# Altium PCB PCB1.PcbDoc
Units mil, origin at the board's own origin, x right, y up, seen from the top; angles counter-clockwise.
Board outline 3266.25 x 3995 mil, 4 copper layers (Top Layer, GND, Power, Bottom Layer), stack 30.634 mil thick; 104 components, 63 nets, 320 pads, 68 vias.
Unrouted connection lines stored in the file: 1.
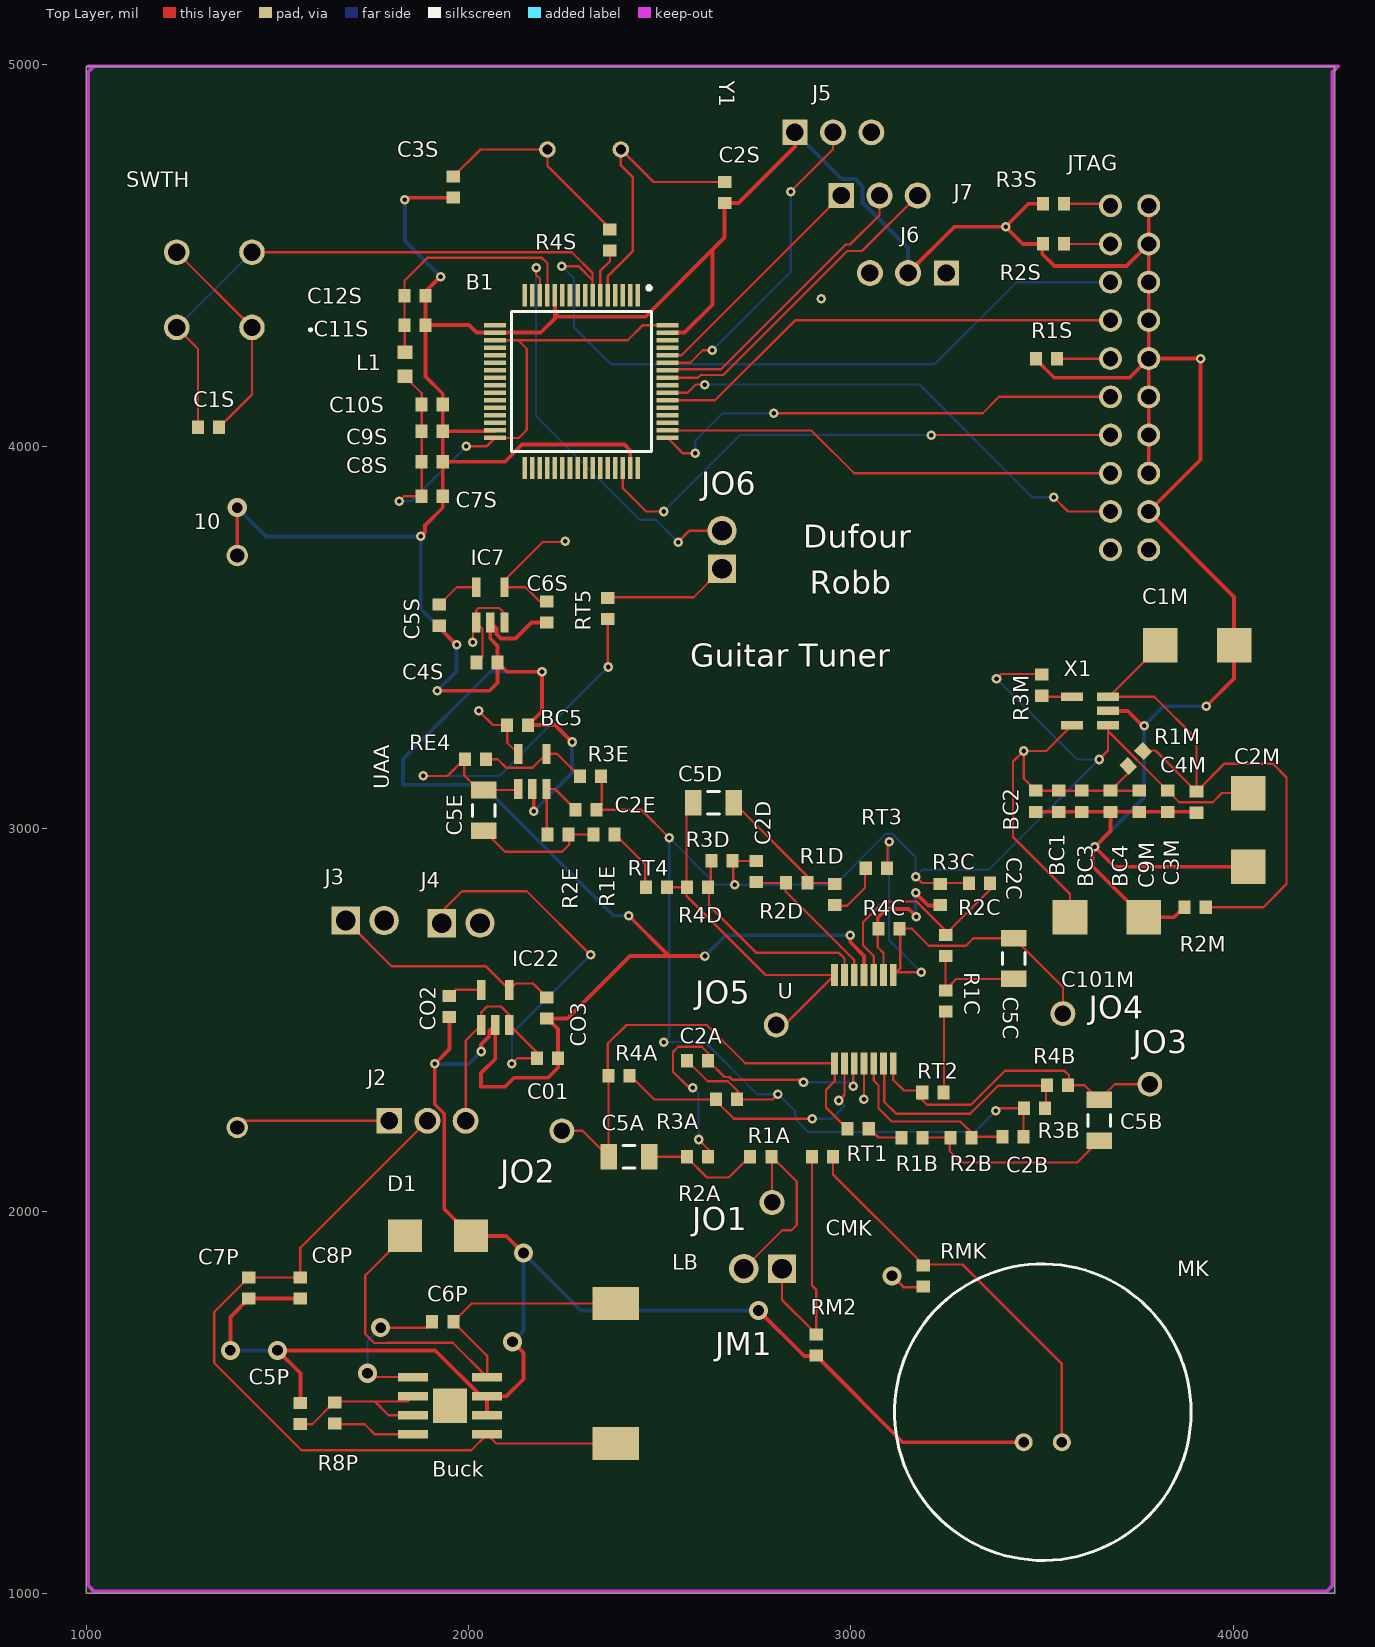
[diagram p0: Top Layer view]
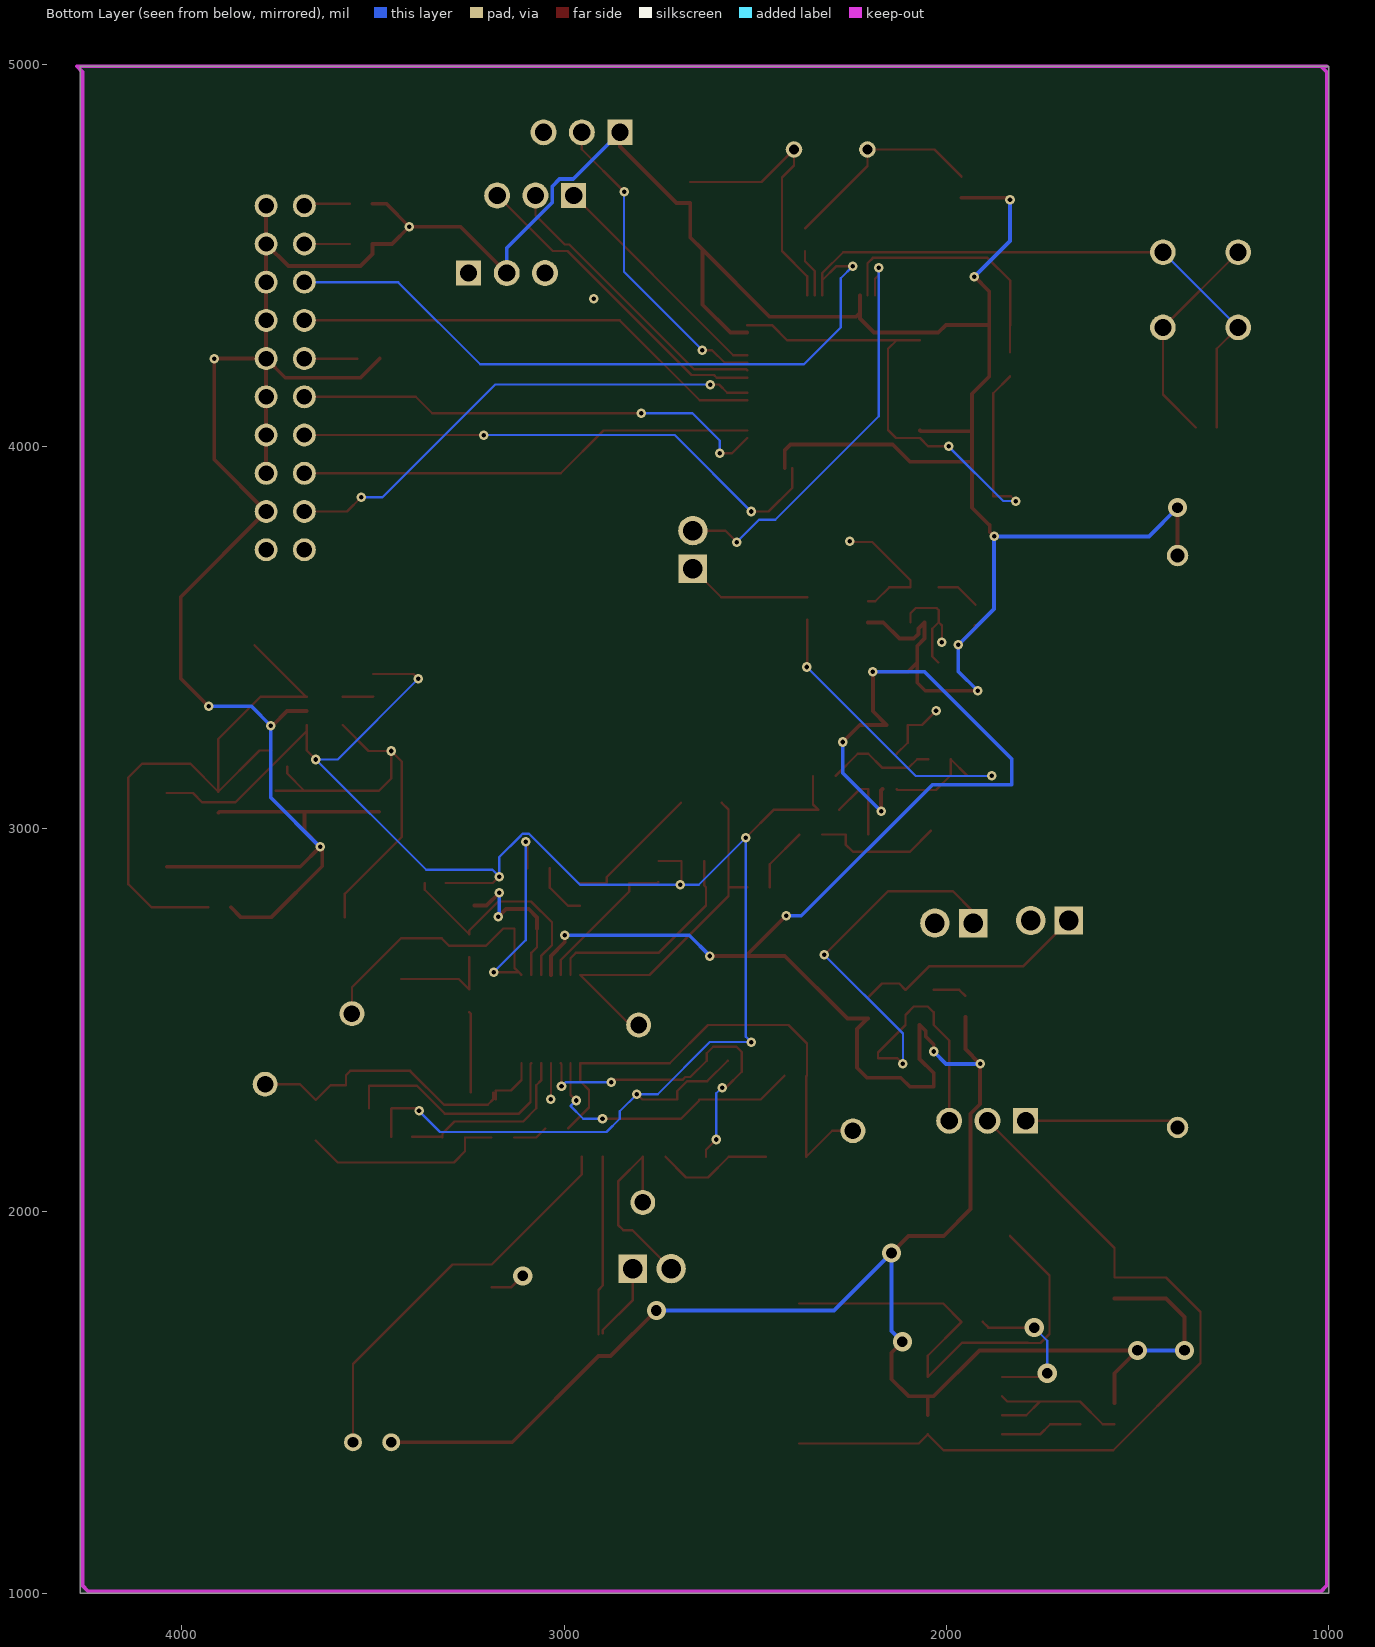
[diagram p1: Bottom Layer view, seen from below]
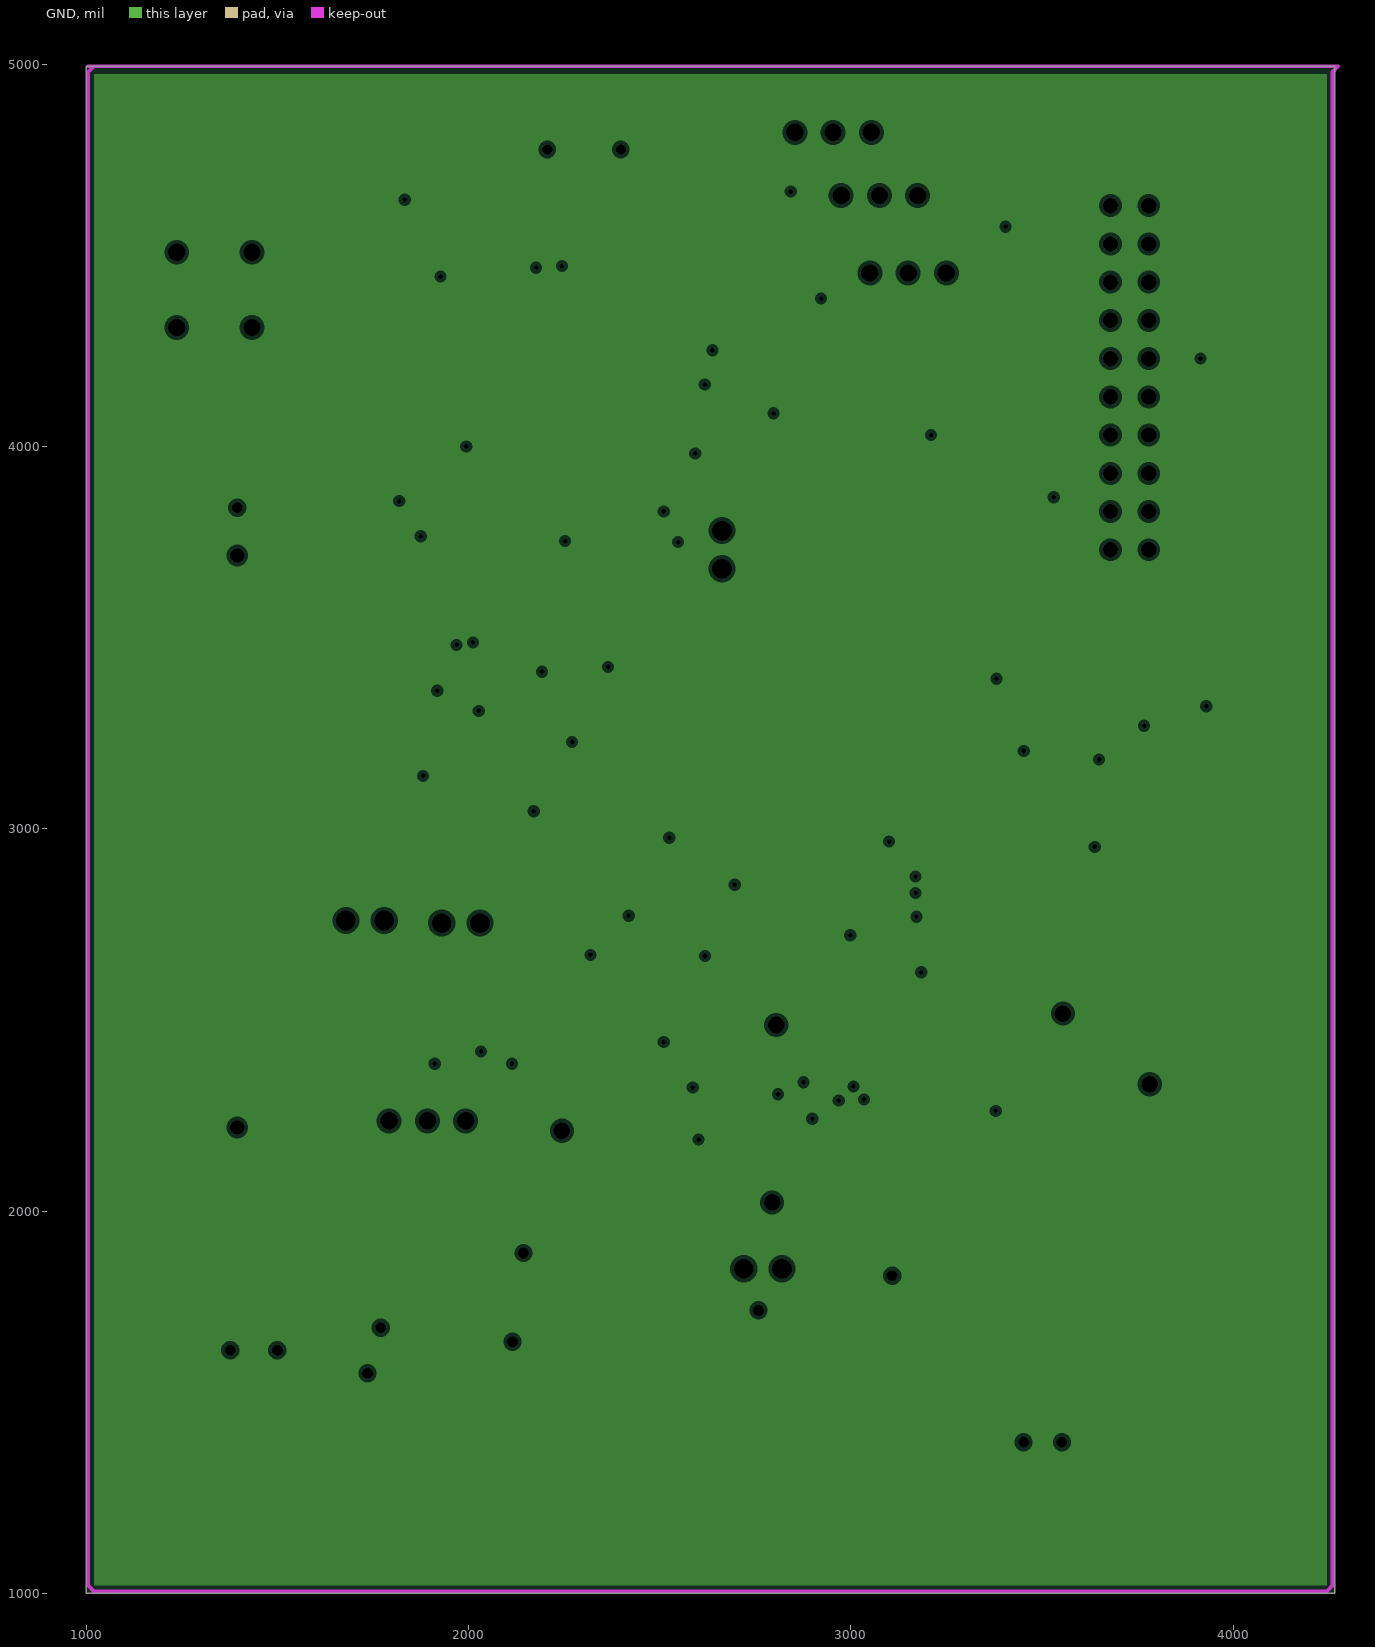
[diagram p2: GND, clearances drawn from the general rule]
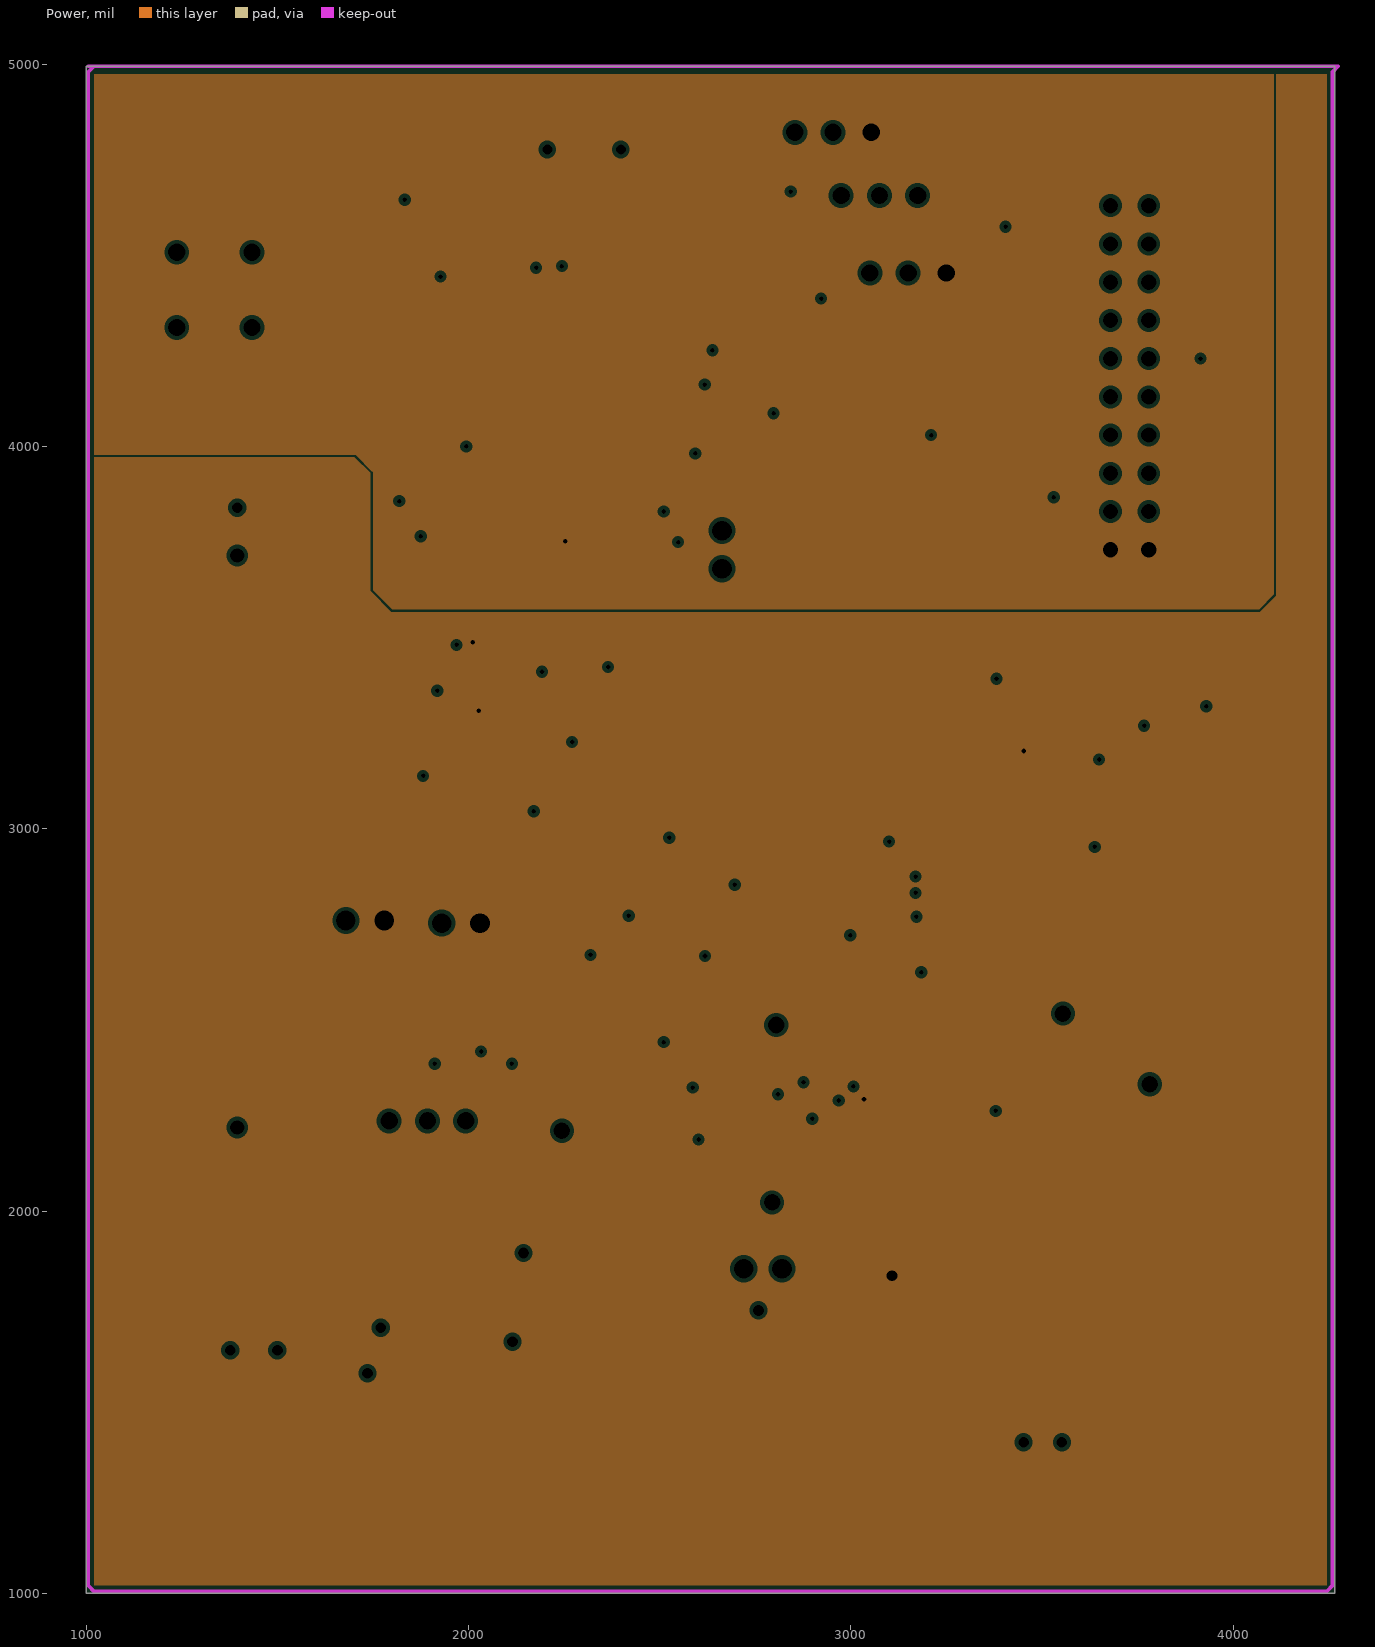
[diagram p3: Power, clearances drawn from the general rule]

## Layer stack, top to bottom
Top Solder: solder mask 0.4, Solder Resist, Dk 3.5
Top Layer: signal copper 1.4
Dielectric 1: core 10, FR-4, Dk 4.2
GND: plane copper 1.417
Dielectric 3: prepreg 5, Dk 4.2
Power: plane copper 1.417, net VCC
Dielectric 2: core 10, Dk 4.2
Bottom Layer: signal copper 1.4
Bottom Solder: solder mask 0.4, Solder Resist, Dk 3.5

## Board outline
4266.25,4995 4150,4995 1000,4995 1000,1000 4266.25,1000

## Design rules (kind name [scope] priority, off if disabled: settings)
BoardOutlineClearance [All] p1: gap=15 ignorepadtopadclearanceinfootprint=FALSE
Clearance "Clearance Polygons" [InPolygon] p1: gap=10 ignorepadtopadclearanceinfootprint=FALSE except(0: Arc-Hole Track-Hole SMDPad-Hole THPad-Hole Via-Hole Fill-Hole Poly-Hole Region-Hole Text-Hole)
Clearance [All] p2: gap=5 ignorepadtopadclearanceinfootprint=FALSE except(0: Arc-Hole Track-Hole SMDPad-Hole THPad-Hole Via-Hole Fill-Hole Poly-Hole Region-Hole Text-Hole)
ComponentClearance "HM-TRP & UFL" [InComponent('X1') vs InComponent('U1')] p1: gap=0 collisioncheckmode=3 verticalgap=0 showdistances=FALSE
ComponentClearance [All] p2: gap=1 collisioncheckmode=3 verticalgap=1 showdistances=FALSE
DiffPairsRouting [All] p1: maxlimit=393.7 minlimit=5 mostfreqgap=8 toplayer_minwidth=5 toplayer_maxwidth=15 toplayer_prefwidth=8 bottomlayer_minwidth=5 bottomlayer_maxwidth=15 bottomlayer_prefwidth=8 maxuncoupledlength=500
HoleSize [All] p1: absolutevalues=TRUE maxlimit=265 minlimit=10 maxpercent=80.000 minpercent=20.000
HoleToHoleClearance [All] p1: gap=10 allowstackedmicrovias=FALSE
MinimumAnnularRing [All] p1: minimumring=4
MinimumSolderMaskSliver [All] p1: minsoldermaskwidth=0
PlaneClearance [All] p1: clearance=10
PlaneConnect [All] p1: planeconnectstyle=Relief reliefexpansion=4 reliefentries=4 reliefconductorwidth=6 reliefairgap=6
PolygonConnect "Via connect style" [isVia] p1: connectstyle=Direct reliefconductorwidth=10 reliefentries=4 polygonreliefangle="90 Angle" airgapwidth=10
PolygonConnect [All] p2: connectstyle=Relief reliefconductorwidth=10 reliefentries=4 polygonreliefangle="90 Angle" airgapwidth=6
RoutingCorners [All] p1: cornerstyle=45-Degree minsetback=49.21 maxsetback=49.21
RoutingVias [All] p1: holewidth=12 width=22 viastyle="Through Hole" minholewidth=10 minwidth=18 maxholewidth=100 maxwidth=114
SilkToSilkClearance [All] p1: silktosilkclearance=0
SilkToSolderMaskClearance [IsPad] p1: minsilkscreentomaskgap=5 clearancetoexposedcopper=TRUE
SolderMaskExpansion [All] p1: expansion=2.5
Width GND [InNet('GND')] p1: maxlimit=30 minlimit=10 preferedwidth=20
Width Power [InNetClass('Power')] p2: maxlimit=40 minlimit=20 preferedwidth=30
Width 3V3 [InNetClass('3V3')] p3: maxlimit=30 minlimit=10 preferedwidth=20
Width [All] p4: maxlimit=400 minlimit=6 preferedwidth=8
20 further rules are at their usual default settings.

## Classes and differential pairs
component class STM32L476_MCU: B1 C1S C2S C3S C4S C5S C6S C7S C8S C9S C10S C11S C12S IC7 J5 J6 J7 JTAG L1 R1S R2S R3S R4S SWTH Y1
component class Power_Supply: 10 Buck C01 C1M C2M C3M C4M C5P C6P C7P C8P C9M C101M CO2 CO3 D1 IC22 J2 J3 J4 LB R1M R2M R3M R8P X1
component class Mic_Circuit: CMK JM1 MK RM2 RMK
component class ButterWorth_8th_order_Filter: BC1 BC2 BC3 BC4 BC5 C2A C2B C2C C2D C2E C5A C5B C5C C5D C5E JO1 JO2 JO3 JO4 JO5 JO6 R1A R1B R1C R1D R1E R2A R2B R2C R2D R2E R3A R3B R3C R3D R3E R4A R4B R4C R4D RE4 RT1 RT2 RT3 RT4 RT5 U UAA

## Components (designator, comment, footprint, x,y, rotation, side; value= is the part's Value field where it differs from the comment)
10 "RP" RESAD3800W75L1600D550 1395,2218.7 r90 top
B1 "STM32L476RGT6" QFP50P1200X1200X160-64N 2295,4170 r270 top
BC1 "Cap Semi" 1608[0603] 3544.49,3071.98 r90 top value=.1uF
BC2 "Cap Semi" 1608[0603] 3484.49,3071.98 r90 top value=.1uF
BC3 "Cap Semi" 1608[0603] 3604.49,3071.98 r270 top value=.1uF
BC4 "Cap Semi" 1608[0603] 3679.49,3071.98 r270 top value=.1uF
BC5 "Cap Semi" 1608[0603] 2128.6,3271.29 r180 top value=.1uF
Buck "Step-Down RegulatorsSource:  Datasheet" SOIC127P600X175-9N 1951.61,1490.67 r0 top
C01 "Cap Semi" 1608[0603] 2206.42,2400 r180 top value=2.2uF
C1M "Cap Semi" CAPPM6032X280N 3906.46,3480 r180 top value=10nF
C1S "Cap Semi" 1608[0603] 1320,4050 r180 top value=100nF
C2A "Cap Semi" 1608[0603] 2599.49,2393.28 r0 top value=.1uF
C2B "Cap Semi" 1608[0603] 3424.49,2194.1 r180 top value=.1uF
C2C "Cap Semi" 1608[0603] 3336.93,2858.09 r0 top value=.1uF
C2D "Cap Semi" 1608[0603] 2753.16,2888.29 r270 top value=.1uF
C2E "Cap Semi" 1608[0603] 2307.56,3050.13 r180 top value=.1uF
C2M "Cap Semi" CAPPM6032X280N 4039.49,2996.98 r90 top value=10nF
C2S "Cap Semi" 1608[0603] 2670,4664.38 r90 top value=20p
C3M "Cap Semi" 1608[0603] 3829.49,3071.98 r90 top value=100nF
C3S "Cap Semi" 1608[0603] 1960.12,4678.56 r90 top value=20p
C4M "Cap Semi" 1608[0603] 3904.49,3069.47 r90 top value=100nF
C4S "Cap Semi" 1608[0603] 2048.61,3435 r180 top value=2.2uF
C5A "Cap Semi" C1206 2419.49,2141.98 r0 top value=.1uF
C5B "Cap Semi" C1206 3649.49,2237.41 r270 top value=.1uF
C5C "Cap Semi" C1206 3426.89,2660.29 r270 top value=.1uF
C5D "Cap Semi" C1206 2641.03,3068.05 r0 top value=.1uF
C5E "Cap Semi" C1206 2040,3048.36 r270 top value=.1uF
C5P "Cap Semi" 1608[0603] 1560,1470 r270 top value=10uF
C5S "Cap Semi" 1608[0603] 1923.7,3558.7 r90 top value=10nF
C6P "Cap Semi" 1608[0603] 1932.56,1710 r180 top value=.1uF
C6S "Cap Semi" 1608[0603] 2205,3567.56 r90 top value=2.2uF
C7P "Cap Semi" 1608[0603] 1425,1798.5 r90 top value=22uF
C7S "Cap Semi" 1608[0603] 1905,3870 r180 top value=100nF
C8P "Cap Semi" 1608[0603] 1560,1798.5 r90 top value=22uF
C8S "Cap Semi" 1608[0603] 1905,3960 r180 top value=100nF
C9M "Cap Semi" 1608[0603] 3754.49,3071.98 r90 top value=.1uF
C9S "Cap Semi" 1608[0603] 1905,4040 r180 top value=100nF
C10S "Cap Semi" 1608[0603] 1905,4110 r180 top value=4.7uF
C11S "Cap Semi" 1608[0603] 1860,4317.64 r180 top value=1uF
C12S "Cap Semi" 1608[0603] 1860,4395 r180 top value=10nF
C101M "Cap Semi" CAPPM6032X280N 3670,2768.35 r180 top value=.1uF
CMK "Cap Semi" 1608[0603] 2926.12,2141.99 r0 top value=1uF
CO2 "Cap Semi" 1608[0603] 1950,2535 r90 top value=10nF
CO3 "Cap Semi" 1608[0603] 2205,2530.91 r90 top value=2.2uF
D1 "B330B" DIOM5336X250N 1920,1935 r0 top
IC7 "ADP1714" SOT95P280X100-5N 2057,3586 r90 top
IC22 "ADP1714" SOT95P280X100-5N 2070,2532.56 r90 top
J2 "3 pins" HDRV3W95P0X254_1X3_762X254X869 1792.52,2236.1 r0 top
J3 "2PIN" HDRV2W110P0X254_1X2_508X254X85 1679.25,2760 r0 top
J4 "2PIN" HDRV2W110P0X254_1X2_508X254X85 1930,2753.35 r0 top
J5 "J5" HDRV3W95P0X254_1X3_762X254X869 2853.68,4822.05 r0 top
J6 "J6" HDRV3W95P0X254_1X3_762X254X869 3250,4453.88 r180 top
J7 "J7" HDRV3W95P0X254_1X3_762X254X869 2975,4656.65 r0 top
JM1 "2PIN" HDRV2W110P0X254_1X2_508X254X85 2820,1849.17 r180 top
JO1 "1Pin Header" 68000-401HLF 2794.02,2022.4 r0 top
JO2 "1Pin Header" 68000-401HLF 2244.34,2210 r0 top
JO3 "1Pin Header" 68000-401HLF 3782.24,2331.79 r0 top
JO4 "1Pin Header" 68000-401HLF 3555,2516.43 r0 top
JO5 "1Pin Header" 68000-401HLF 2805,2486.68 r0 top
JO6 "2PIN" HDRV2W110P0X254_1X2_508X254X85 2663.16,3680 r90 top
JTAG "JTAG" SAMTEC_SSW-110-01-G 3779.49,4630 r270 top
L1 "TAIYO YUDEN - BK1608HS601-T - FERRITE BEAD, 0.45OHM, 350mA, 0603Source:  Datasheet" BEADC1608X95N 1833.39,4215 r90 top
LB "MSS1038" INDM102102X400N 2385,1575 r270 top
MK "ELECTRET CONDENSER MICROPHONESource:  Datasheet" CMA-4544PF-W 3502.25,1473.74 r270 top
R1A "R1A" 1608[0603] 2764.49,2141.98 r180 top value=1.6k
R1B "Res3" 1608[0603] 3160.24,2192.13 r0 top value=1.2k
R1C "Res3" 1608[0603] 3247.96,2549.9 r90 top value=2k
R1D "Res3" 1608[0603] 2958.2,2828.29 r90 top value=16.2k
R1E "Res3" 1608[0603] 2354.53,2985 r180 top value=1.2k
R1M "Res3" 1608[0603] 3745.36,3183.68 r45 top value=10k
R1S "R1S" 1608[0603] 3511.74,4230 r180 top value=10k
R2A "Res3" 1608[0603] 2599.02,2141.99 r0 top value=64k
R2B "Res3" 1608[0603] 3288.65,2192.13 r0 top value=8k
R2C "Res3" 1608[0603] 3247.96,2694.27 r90 top value=5.2k
R2D "Res3" 1608[0603] 2858.69,2858.29 r180 top value=16.2k
R2E "Res3" 1608[0603] 2233.98,2985 r180 top value=8k
R2M "Res3" 1608[0603] 3901.1,2794.82 r180 top value=1k
R2S "R2S" 1608[0603] 3530.44,4530 r180 top value=10k
R3A "Res3" 1608[0603] 2674.49,2291.98 r0 top value=8.6k
R3B "Res3" 1608[0603] 3480.97,2268.64 r180 top value=2.4k
R3C "Res3" 1608[0603] 3234.18,2828.56 r90 top value=3.5k
R3D "Res3" 1608[0603] 2663.16,2915.84 r0 top value=0
R3E "Res3" 1608[0603] 2319.19,3138 r0 top value=2.4k
R3M "Res3" 1608[0603] 3499.49,3375.56 r90 top value=100K
R3S "R3S" 1608[0603] 3530.44,4635 r180 top value=10k
R4A "Res3" 1608[0603] 2393.94,2354.19 r0 top value=1.6k
R4B "Res3" 1608[0603] 3541.26,2328.83 r180 top value=7.6k
R4C "Res3" 1608[0603] 3100.2,2739.03 r180 top value=6.5k
R4D "Res3" 1608[0603] 2599.49,2846.98 r0 top value=0
R4S "Res3" 1608[0603] 2370,4540.79 r270 top value=390
R8P "Res3" 1608[0603] 1650,1471.97 r90 top value=100K
RE4 "Res3" 1608[0603] 2017.99,3182 r0 top value=7.6k
RM2 "Res3" 1608[0603] 2910,1650 r90 top value=1M
RMK "Res3" 1608[0603] 3189.37,1830.47 r90 top value=2.2k
RT1 "Res3" 1608[0603] 3019.49,2215.76 r180 top value=0
RT2 "Res3" 1608[0603] 3214.49,2310.13 r0 top value=0
RT3 "Res3" 1608[0603] 3066.74,2896.69 r0 top value=0
RT4 "Res3" 1608[0603] 2491.5,2846.98 r0 top value=0
RT5 "Res3" 1608[0603] 2363.9,3576.42 r270 top value=0
SWTH "D6C90F1LFS (Key Switches)Source:  Datasheet" D6C10F1LFS 1335,4410 r180 top
U "TLV6004" SOP65P640X120-14N 3034.49,2501.98 r90 top
UAA "Universal Opamp model that allows 4 different levels of simulation accuracy.  See ./examples/Educational/UniversalOpamp2.asc for details.  En and in are equivalent voltage and current noises.  Enk and ink are the respective corner frequencies.  Phimargin is used to set the 2nd pole or delay to the approximate phase margin for level.3a and level.3b.  This version uses the new, experimental level 2 switch as the output devices." SOT95P280X100-5N 2167.05,3150 r90 top
X1 "REF" SOT95P290X145-5N 3626.15,3308.29 r180 top
Y1 "ABRACON - ABL-20" HC/49US_(AT49)PTH 2302.48,4777.05 r0 top

## Footprints (in the part's own frame and the unit in brackets; to place one, negate y for a bottom-side part, rotate by r counter-clockwise, add the part's x,y. Pads: shape width x height; smd on the part's side, far side on the other; paste and mask are expansions set on the pad)
1608[0603] [mm] "Chip Capacitor, Body 1.6x0.8mm, IPC High Density"
  rect 0.8x0.9 smd: 1(-0.7,0) 2(0.7,0)
  body extent -0.87,-0.48 0.87,0.48, height 1.3
68000-401HLF [mm]
  round 1.65 / inner round 1.524 / far side round 1.65 hole 1.1: 1(0,0)
BEADC1608X95N [mil]
  rect 35.43x39.37 smd: 1(-31.5,0) 2(31.5,0)
C1206 [mm] "Chip Capacitor, Body 3.2x1.6mm, IPC High Density"
  rect 1.1x1.7 smd: 1(-1.35,0) 2(1.35,0)
  silkscreen extent -0.4,-0.75 0.4,0.75, body extent -1.7,-0.9 1.7,0.9, height 1.3
CAPPM6032X280N [mil]
  rect 90.55x90.55 smd: 1(-96.46,0) 2(96.46,0)
CMA-4544PF-W [mil]
  round 47.24 / inner round 60 / far side round 47.24 hole 27.56: 1(78.74,50) 2(78.74,-50)
  silkscreen extent -388,-388 388,388
D6C10F1LFS [mil]
  round 66.93 / inner round 60 / far side round 66.93 hole 44.88: 1(-98.43,98.43) 2(-98.43,-98.43) 3(98.43,-98.43) 4(98.43,98.43)
  silkscreen extent -254,102 -249,107
DIOM5336X250N [mil]
  rect 88.58x84.65 smd: 1(-86.61,0) 2(86.61,0)
HC/49US_(AT49)PTH [mil]
  round 43.31 / inner round 60 / far side round 43.31 hole 25.98: 1(-96.06,0) 2(96.06,0)
HDRV2W110P0X254_1X2_508X254X85 [mil]
  rect 74.33x74.33 / inner rect 60x60 / far side rect 74.33x74.33 hole 51.18: 1(0,0)
  round 76.77 / inner round 60 / far side round 76.77 hole 51.18: 2(100,0)
HDRV3W95P0X254_1X3_762X254X869 [mil]
  rect 65.75x65.75 / inner rect 60x60 / far side rect 65.75x65.75 hole 45.28: 1(0,0)
  round 67.91 / inner round 60 / far side round 67.91 hole 45.28: 2(100,0) 3(200,0)
INDM102102X400N [mil]
  rect 86.61x122.05 smd: 1(-183.07,0) 2(183.07,0)
QFP50P1200X1200X160-64N [mm]
  rect 1.475x0.3 smd: 1(-5.738,3.75) 2(-5.738,3.25) 3(-5.738,2.75) 4(-5.738,2.25) 5(-5.738,1.75) 6(-5.738,1.25) 7(-5.738,0.75) 8(-5.738,0.25) 9(-5.738,-0.25) 10(-5.738,-0.75) 11(-5.738,-1.25) 12(-5.738,-1.75) 13(-5.738,-2.25) 14(-5.738,-2.75) 15(-5.738,-3.25) 16(-5.738,-3.75) 33(5.738,-3.75) 34(5.738,-3.25) 35(5.738,-2.75) 36(5.738,-2.25) 37(5.738,-1.75) 38(5.738,-1.25) 39(5.738,-0.75) 40(5.738,-0.25) 41(5.738,0.25) 42(5.738,0.75) 43(5.738,1.25) 44(5.738,1.75) 45(5.738,2.25) 46(5.738,2.75) 47(5.738,3.25) 48(5.738,3.75)
  rect 0.3x1.475 smd: 17(-3.75,-5.738) 18(-3.25,-5.738) 19(-2.75,-5.738) 20(-2.25,-5.738) 21(-1.75,-5.738) 22(-1.25,-5.738) 23(-0.75,-5.738) 24(-0.25,-5.738) 25(0.25,-5.738) 26(0.75,-5.738) 27(1.25,-5.738) 28(1.75,-5.738) 29(2.25,-5.738) 30(2.75,-5.738) 31(3.25,-5.738) 32(3.75,-5.738) 49(3.75,5.738) 50(3.25,5.738) 51(2.75,5.738) 52(2.25,5.738) 53(1.75,5.738) 54(1.25,5.738) 55(0.75,5.738) 56(0.25,5.738) 57(-0.25,5.738) 58(-0.75,5.738) 59(-1.25,5.738) 60(-1.75,5.738) 61(-2.25,5.738) 62(-2.75,5.738) 63(-3.25,5.738) 64(-3.75,5.738)
  silkscreen extent -6.35,-4.65 4.65,4.65
RESAD3800W75L1600D550 [mil]
  round 56.1 / inner round 60 / far side round 56.1 hole 37.4: 1(0,0) 2(1496.06,0)
SAMTEC_SSW-110-01-G [mil]
  round 60 hole 40: 1(900,-100) 2(900,0) 3(800,-100) 4(800,0) 5(700,-100) 6(700,0) 7(600,-100) 8(600,0) 9(500,-100) 10(500,0) 11(400,-100) 12(400,0) 13(300,-100) 14(300,0) 15(200,-100) 16(200,0) 17(100,-100) 18(100,0) 19(0,-100) 20(0,0)
SOIC127P600X175-9N [mil]
  rect 78x22 smd: 1(-97,75) 2(-97,25) 3(-97,-25) 4(-97,-75) 5(97,-75) 6(97,-25) 7(97,25) 8(97,75)
  rect 90x90 smd: 9(0,0)
SOP65P640X120-14N [mm]
  rect 1.475x0.45 smd: 1(-2.938,1.95) 2(-2.938,1.3) 3(-2.938,0.65) 4(-2.938,0) 5(-2.938,-0.65) 6(-2.938,-1.3) 7(-2.938,-1.95) 8(2.938,-1.95) 9(2.938,-1.3) 10(2.938,-0.65) 11(2.938,0) 12(2.938,0.65) 13(2.938,1.3) 14(2.938,1.95)
SOT95P280X100-5N [mil]
  rect 52x22 smd: 1(-46,37) 2(-46,0) 3(-46,-37) 4(46,-37) 5(46,37)
SOT95P290X145-5N [mil]
  rect 58x22 smd: 1(-47,37) 2(-47,0) 3(-47,-37) 4(47,-37) 5(47,37)

## Part data
10: library part ROX3SJ220R, Manufacturer_Name="TE Connectivity", Package=RESAD3800W75L1600D550, Allied_Number=70063816, Allied_Price-Stock=https://www.alliedelec.com/te-connectivity-rox3sj220r/70063816/, Arrow_Part_Number=ROX3SJ220R, Arrow_Price-Stock=https://www.arrow.com/en/products/rox3sj220r/te-connectivity, DeviceSetName=ROX3SJ220R, GateName_1=G$1, Height=mm, LibraryName=ROX3SJ220R, Manufacturer_Part_Number=ROX3SJ220R, RS_Part_Number=1615998, RS_Price-Stock=http://uk.rs-online.com/web/p/products/1615998, SymbolName_1=ROX3SJ220R
B1: "ARM MCU 32-bit 80MHz 1024KB  LQFP64 STMicroelectronics STM32L476RGT6, 32bit ARM Cortex M4 MCU, 80MHz, 1 MB Flash, 64-Pin LQFP", Manufacturer_Name=STMicroelectronics, RS Part Number=1658235, Arrow Part Number=STM32L476RGT6, Arrow Price/Stock=https://www.arrow.com/en/products/stm32l476rgt6/stmicroelectronics, Datasheet Link=https://componentsearchengine.com/Datasheets/1/STM32L476RGT6.pdf, Geometry.Height=1.6mm, Manufacturer_Part_Number=STM32L476RGT6, RS Price/Stock=http://uk.rs-online.com/web/p/products/1658235
BC1 BC2 BC3 BC4 BC5 C01 C1M C1S C2A C2B C2C C2D C2E C2M C2S C3M C3S C4M C4S C5A C5B C5C C5D C5E C5P C5S C6P C6S C7P C7S C8P C8S C9M C9S C10S C11S C12S C101M CMK CO2 CO3: "Capacitor (Semiconductor SIM Model)", LatestRevisionDate=29-May-2009, LatestRevisionNote="IPC-7351 Footprint Added.", PackageDescription="Chip Capacitor", PackageReference=C1206, Published=8-Jun-2000, Publisher="Altium Limited"
Buck: library part ADP2302ARDZ-5.0-R7, Manufacturer_Name="Analog Devices", Package=SOIC127P600X175-9N, Arrow_Part_Number=ADP2302ARDZ-5.0-R7, Arrow_Price-Stock=https://www.arrow.com/en/products/adp2302ardz-5.0-r7/analog-devices, DeviceSetName=ADP2302ARDZ-5.0-R7, GateName_1=G$1, Height=mm, LibraryName=ADP2302ARDZ-5.0-R7, Manufacturer_Part_Number=ADP2302ARDZ-5.0-R7, RS_Part_Number=7591815P, RS_Price-Stock=http://uk.rs-online.com/web/p/products/7591815P, SymbolName_1=ADP2302ARDZ-5.0-R7
D1: library part B330B-13-F, Manufacturer_Name="Diodes Inc.", Package=DIOM5336X250N, Arrow_Part_Number=B330B-13-F, Arrow_Price-Stock=https://www.arrow.com/en/products/b330b-13-f/diodes-incorporated, DeviceSetName=B330B-13-F, GateName_1=G$1, Height=2.5mm, LibraryName=B330B-13-F, Manufacturer_Part_Number=B330B-13-F, RS_Part_Number=9228339, RS_Price-Stock=http://uk.rs-online.com/web/p/products/9228339, SymbolName_1=B330B-13-F
IC7 IC22: library part ADP1714AUJZ-3.3-R7, Manufacturer_Name="Analog Devices", Package=SOT95P280X100-5N, Arrow_Part_Number=ADP1714AUJZ-3.3-R7, DeviceSetName=ADP1714AUJZ-3.3-R7, GateName_1=G$1, Height=mm, LibraryName=ADP1714AUJZ-3.3-R7, Manufacturer_Part_Number=ADP1714AUJZ-3.3-R7, SymbolName_1=ADP1714AUJZ-3.3-R7
J2 J5 J6 J7: library part 61300311121, Manufacturer_Name="Wurth Elektronik", Package=HDRV3W95P0X254_1X3_762X254X869, Arrow_Part_Number=61300311121, Arrow_Price-Stock=http://uk.rs-online.com/web/p/products/1725145, DeviceSetName=61300311121, GateName_1=G$1, Height=8.69mm, LibraryName=61300311121, Manufacturer_Part_Number=61300311121, RS_Part_Number=1725145, RS_Price-Stock=http://uk.rs-online.com/web/p/products/1725145, SymbolName_1=61300311121
J3 J4 JM1 JO6: library part 61300211121, Manufacturer_Name="Wurth Elektronik", Package=HDRV2W110P0X254_1X2_508X254X85, Arrow_Part_Number=61300211121, Arrow_Price-Stock=http://uk.rs-online.com/web/p/products/8281581P, DeviceSetName=61300211121, GateName_1=G$1, Height=8.54mm, LibraryName=61300211121, Manufacturer_Part_Number=61300211121, RS_Part_Number=8281581P, RS_Price-Stock=http://uk.rs-online.com/web/p/products/8281581P, SymbolName_1=61300211121
JO1 JO2 JO3 JO4 JO5: library part 68000-401HLF, Manufacturer_Name=FCI, Arrow_Part_Number=68000-401HLF, Arrow_Price-Stock=https://www.arrow.com/en/products/68000-401hlf/amphenol-fci, DeviceSetName=68000-401HLF, GateName_1=G$1, Height=mm, LibraryName=68000-401HLF, Manufacturer_Part_Number=68000-401HLF, Package=68000-401HLF, RS_Part_Number=8632706, RS_Price-Stock=http://uk.rs-online.com/web/p/products/8632706, SymbolName_1=68000-401HLF
JTAG: library part SSW-110-01-G-D, Manufacturer_Name=SAMTEC, Package=SAMTEC_SSW-110-01-G, Arrow_Part_Number=SSW-110-01-G-D, Arrow_Price-Stock=https://www.arrow.com/en/products/ssw-110-01-g-d/samtec, DeviceSetName=SSW-110-01-G-D, GateName_1=G$1, Height=mm, LibraryName=SSW-110-01-G-D, Manufacturer_Part_Number=SSW-110-01-G-D, RS_Part_Number=7655727P, RS_Price-Stock=http://uk.rs-online.com/web/p/products/7655727P, SymbolName_1=SSW-110-01-G-D
L1: library part BK1608HS601-T, Manufacturer_Name="TAIYO YUDEN", Package=BEADC1608X95N, Arrow_Part_Number=BK1608HS601-T, DeviceSetName=BK1608HS601-T, GateName_1=G$1, Height=0.95mm, LibraryName=BK1608HS601-T, Manufacturer_Part_Number=BK1608HS601-T, SymbolName_1=BK1608HS601-T
LB: library part MSS1038-183MLB, Manufacturer_Name=COILCRAFT, Package=INDM102102X400N, Arrow_Part_Number=MSS1038-183MLB, DeviceSetName=MSS1038-183MLB, GateName_1=G$1, Height=4mm, LibraryName=MSS1038-183MLB, Manufacturer_Part_Number=MSS1038-183MLB, SymbolName_1=MSS1038-183MLB
MK: library part CMA-4544PF-W, Manufacturer_Name=CUI, Arrow_Part_Number=CMA-4544PF-W, Arrow_Price-Stock=https://www.arrow.com/en/products/cma-4544pf-w/cui-inc, DeviceSetName=CMA-4544PF-W, GateName_1=G$1, Height=mm, LibraryName=CMA-4544PF-W, Manufacturer_Part_Number=CMA-4544PF-W, Package=CMA-4544PF-W, SymbolName_1=CMA-4544PF-W
R1A R1S R2S R3S: library part Res3, "Resistor", LatestRevisionDate=29-May-2009, LatestRevisionNote="IPC-7351 Footprint Added.", PackageDescription="Chip Resistor", PackageReference=J1-0603, Published=8-Jun-2000, Publisher="Altium Limited"
R1B R1C R1D R1E R1M R2A R2B R2C R2D R2E R2M R3A R3B R3C R3D R3E R3M R4A R4B R4C R4D R4S R8P RE4 RM2 RMK RT1 RT2 RT3 RT4 RT5: "Resistor", LatestRevisionDate=29-May-2009, LatestRevisionNote="IPC-7351 Footprint Added.", PackageDescription="Chip Resistor", PackageReference=J1-0603, Published=8-Jun-2000, Publisher="Altium Limited"
SWTH: library part D6C90F1LFS, Manufacturer_Name="C & K COMPONENTS", Package=D6C10F1LFS, Arrow_Part_Number=D6C90F1LFS, Arrow_Price-Stock=https://www.arrow.com/en/products/d6c90f1lfs/ck, DeviceSetName=D6C90F1LFS, GateName_1=G$1, Height=mm, LibraryName=D6C90F1LFS, Manufacturer_Part_Number=D6C90F1LFS, SymbolName_1=D6C90F1LFS
U: library part LP2901D, "Low Power Quad Differential Comparator", Code_IPC=SOIC127P600-14, ComponentLink1Description="Manufacturer Link", ComponentLink1URL=http://www.ti.com/, ComponentLink2Description=Datasheet, ComponentLink2URL=http://www-s.ti.com/sc/ds/lp2901.pdf, DatasheetVersion=May-1988, LatestRevisionDate=13-Apr-2006, LatestRevisionNote="IPC-7351 Footprint Added.", PackageDescription="14-Pin Small Outline Integrated Circuit 1.27 mm Pitch", PackageReference=D014, PackageVersion=Jan-1998, Published=16-Jan-2001, Publisher="Altium Limited"
UAA: library part UNIVERSALOPAMP2, Package=S8, DeviceSetName=UNIVERSALOPAMP2, GateName_1=G$1, LibraryName=Opamps, SymbolName_1=UNIVERSALOPAMP2
X1: library part OPAMP2, Package=S8, DeviceSetName=OPAMP2, GateName_1=G$1, LibraryName=Opamps, SymbolName_1=OPAMP2
Y1: library part ABL-20.000MHZ-B2, Manufacturer_Name=ABRACON, Package=HC/49US_(AT49)PTH, Arrow_Part_Number=ABL-20.000MHZ-B2, Arrow_Price-Stock=https://www.arrow.com/en/products/abl-20.000mhz-b2/abracon, DeviceSetName=ABL-20.000MHZ-B2, GateName_1=G$1, Height=mm, LibraryName=ABL-20.000MHZ-B2, Manufacturer_Part_Number=ABL-20.000MHZ-B2, RS_Part_Number=1710202, RS_Price-Stock=http://uk.rs-online.com/web/p/products/1710202, SymbolName_1=ABL-20.000MHZ-B2

## Via types
v1: diameter 25, hole 12, Top Layer to Bottom Layer, 59 vias
v2: diameter 50, hole 28, Top Layer to Bottom Layer, 9 vias

## Nets (pads, with @x,y where several pads share a name; then routed paths per layer and width w, separated by ;. In a path a pad name is that pad's centre, name@x,y a point inside that pad or via, vN(x,y) a via of type N, cw(c..) or ccw(c..) an arc to the next point about the centre after c; other vN are vias at no path point)
FILTER_OUT: B1.14 JO6.1 JO6.2 RT5.1 | length 1429.6
  Top Layer w6: v1(2176.66,4467.65) 2176.66,4449.27 2186.73,4439.2 B1.14 ; RT5.1@2363.9,3605.95 2589.1,3605.95 JO6.1 ; v1(2548.31,3750) 2578.31,3780 JO6.2
  Bottom Layer w6: v1(2176.66,4467.65) 2176.66,4079.12 2447.45,3808.33 2489.99,3808.33 v1(2548.31,3750)
GND: 10.2 B1.12 B1.18 B1.31 B1.47 B1.63 BC1.1 BC2.1 BC3.2 BC4.2 BC5.1 Buck.6 Buck.7 C01.1 C1M.1 C2M.1 C2S.1 C3M.1 C3S.1 C4M.1 C4S.1 C5P.1 C5S.1 C6S.1 C7P.1 C7S.1 C8P.1 C8S.1 C9M.1 C9S.1 C10S.1 C11S.1 C12S.1 C101M.1 CO2.1 CO3.1 D1.2 IC7.2 IC22.2 J5.1 J6.2 JTAG.4 JTAG.6 JTAG.8 JTAG.10 JTAG.12 JTAG.14 JTAG.16 JTAG.18 JTAG.20 MK.2 R1S.2 R2M.2 R2S.2 R3S.2 RM2.1 U.11 UAA.2 X1.2 | length 18603.6
  Top Layer w10: v2(1376.93,1635.47) 1376.93,1722.87 C7P.1 C8P.1 ; 10.2 v2(1395,3840) ; v2(1500,1635.47) v2@1500.47,1635 ; C5P.1 1560,1575.47 v2@1500.47,1635 ; v1(1833.39,4645.68) 1838.71,4651 C3S.1 ; v1(1875,3765) 1886.3,3776.3 1886.3,3795 1887.56,3795 1932.56,3840 C7S.1 C8S.1 ; v1(1917.93,3360.95) 2055,3360.95 2076.17,3382.12 C4S.1 ; C5S.1 1923.7,3526.08 v1(1968.82,3480.95) ; v1(1926.78,4444.65) 1887.56,4405.44 C12S.1 C11S.1 ; CO2.1 1950,2423.44 v1(1911.56,2385) 1911.56,2279.23 1936.48,2254.31 1936.48,2005.13 D1.2 2098.66,1935 v2(2143.66,1890) ; v1(2032.78,2417.27) 2032.78,2435.2 2054,2456.42 2054,2470.56 IC22.2 2070,2398 2033,2361 2033,2325 2095.29,2325 2119.14,2348.86 2207.95,2348.86 2233.98,2374.88 C01.1 2233.98,2476.02 CO3.1@2206.65,2503.35 ; Buck.6 Buck.7 ; B1.31 2067.05,4040 C9S.1 ; v2(2115,1657.87) 2143.66,1629.21 2143.66,1560 2099.33,1515.67 Buck.7 ; UAA.2 2170.78,3100.27 v1(2170.78,3045.95) ; CO3.1 CO3.1@2206.65,2503.35 ; C6S.1 2165.05,3540 2122.73,3497.69 2085.17,3497.69 2073,3509.86 2073,3524 IC7.2 2057,3497.69 2076.17,3478.52 C4S.1 ; B1.12 2226.1,4350 ; v1(2270.83,3226.95) 2226.49,3271.29 BC5.1 2192.2,3307.32 v1(2192.2,3410.91) 2100.26,3410.91 C4S.1 ; v1(2419.34,2772.47) 2524.74,2667.08 ; B1.47 2422.95,3990 2407.95,4005 2140.05,4005 2095.05,3960 C8S.1 ; B1.63 2565,4297.95 2637.87,4370.83 2637.87,4515 ; v1(2618.55,2667.08) 2524.74,2667.08 ; v2(2758.74,1740) 2878.27,1620.47 2910,1620.47 3135.47,1395 MK.2 ; J5.1 2853.68,4784.66 2705.84,4636.82 C2S.1 2670,4547.13 2637.87,4515 ; v1(2998.43,2721.29) 2998.43,2703.52 3034.49,2667.46 U.11 ; J6.2 3271.12,4575 v1(3405,4575) ; R1S.2@3482.21,4230 3532.37,4179.84 3729.33,4179.84 JTAG.12 ; BC2.1 BC1.1 BC3.2 ; R3S.2@3500.91,4635 3465,4635 v1(3405,4575) ; BC3.2 BC4.2 ; X1.2 3724.49,3308.29 3763.15,3269.63 v1(3767.25,3269.63) ; C9M.1 BC4.2 ; C9M.1 C3M.1 3901.98,3044.43 C4M.1 ; JTAG.6 JTAG.8 JTAG.10 JTAG.12 ; JTAG.20 JTAG.18 ; R2M.2@3871.57,2794.82 3845.1,2768.35 C101M.1 3632.74,2902.06 3632.74,2947.25 v1(3638.15,2952.65) ; v1(3930,3320.43) 4002.92,3393.35 C1M.1 4002.92,3606.57 JTAG.4 3915,3965.51 v1(3915,4230) JTAG.12 ; C2M.1 3690.28,2900.53 v1(3638.15,2952.65) ; v2@1500.47,1635 1794.85,1635 1795.32,1635.47 1912.99,1635.47 2032.8,1515.67 Buck.7 ; C11S.1 1887.56,4182.91 1932.56,4137.91 C10S.1 C9S.1 ; C11S.1 2001.3,4317.64 2020.99,4297.95 B1.18 2189.05,4297.95 2226.1,4335 2226.1,4350 ; C8S.1 C9S.1 ; CO3.1@2206.65,2503.35 2259,2503.35 2422.73,2667.08 2524.74,2667.08 ; 2226.1,4350 2236.81,4339.29 2462.17,4339.29 2637.87,4515 ; v1(3405,4575) 3450,4530 3500.91,4530 3500.91,4503.7 3532.68,4471.94 3721.43,4471.94 JTAG.18 ; v1(3638.15,2952.65) 3679.49,2994 BC4.2 ; JTAG.12 JTAG.14 JTAG.16 JTAG.18
  Bottom Layer w10: v2(1376.93,1635.47) v2(1500,1635.47) ; v2(1395,3840) 1470,3765 v1(1875,3765) 1875,3574.78 v1(1968.82,3480.95) 1968.82,3411.85 v1(1917.93,3360.95) ; v1(1833.39,4645.68) 1833.39,4538.04 v1(1926.78,4444.65) ; v1(1911.56,2385) 2000.51,2385 v1(2032.78,2417.27) ; v2(2115,1657.87) 2143.66,1686.54 v2(2143.66,1890) 2293.66,1740 v2(2758.74,1740) ; v1(2170.78,3045.95) 2270.83,3146 v1(2270.83,3226.95) ; v1(2192.2,3410.91) 2056.96,3410.91 1828.87,3182.82 1828.87,3115.29 2036.63,3115.29 2379.45,2772.47 v1(2419.34,2772.47) ; v1(2618.55,2667.08) 2672.77,2721.29 v1(2998.43,2721.29) ; J5.1 2976.2,4699.53 3012.02,4699.53 3031.05,4680.5 3031.05,4638.45 3150,4519.49 J6.2 ; v1(3638.15,2952.65) 3767.25,3081.75 v1(3767.25,3269.63) 3818.04,3320.43 v1(3930,3320.43)
Net10_1: 10.1 J2.1 | length 404.7
  Top Layer w6: 10.1 1412.4,2236.1 J2.1
NetB1_5: B1.5 C2S.2 Y1.2 | length 728.3
  Top Layer w6: B1.5 2363.9,4445.16 2430,4511.26 2430,4703.9 2398.54,4735.36 Y1.2 2483.65,4691.94 C2S.2
NetB1_6: B1.6 R4S.2 | length 126
  Top Layer w6: B1.6 2344.21,4459.21 2370,4485 R4S.2@2370,4511.26
NetB1_7: B1.7 C1S.2 JTAG.15 SWTH.2 SWTH.4 | length 3336.4
  Top Layer w6: SWTH.4 1292.44,4255.7 C1S.2 ; SWTH.2 2269.97,4508.43 2324.53,4453.88 2324.53,4434.76 ; v1(2244.34,4471.94) 2287.36,4471.94 2324.53,4434.76 ; B1.7 2324.53,4434.76
  Bottom Layer w6: SWTH.4 SWTH.2 ; v1(2244.34,4471.94) 2276.05,4440.23 2276.05,4311.57 2372.62,4215 3219.18,4215 3434.18,4430 JTAG.15
NetB1_13: B1.13 C11S.2 C12S.2 L1.2 | length 675.7
  Top Layer w6: L1.2 1833.39,4316.69 C11S.2 C12S.2 1832.44,4433.81 1892.17,4493.55 2192.2,4493.55 2206.42,4479.33 B1.13
NetB1_19: B1.19 B1.32 B1.64 C7S.2 C8S.2 C9S.2 C10S.2 L1.1 | length 1518.6
  Top Layer w6: v1(1818.9,3857.33) 1831.57,3870 C7S.2 C8S.2 C9S.2 C10S.2 1877.44,4139.45 L1.1 ; v1(1994.22,4000.4) 2047.14,4000.4 B1.32 2131.58,4022.36 2152.48,4043.26 2152.48,4064.53 2152.57,4064.62 2152.57,4255.7 2130,4278.27 ; B1.19 2130,4278.27 ; B1.64 2456.19,4317.64 2416.82,4278.27 2130,4278.27
  Bottom Layer w6: v1(1818.9,3857.33) 1851.15,3857.33 v1(1994.22,4000.4)
NetB1_46: B1.46 JTAG.7 | length 1437
  Top Layer w6: B1.46 2403.27,3891.65 2464.92,3830 v1(2510.71,3830) ; v1(3210,4030) JTAG.7
  Bottom Layer w6: v1(2510.71,3830) 2710.71,4030 v1(3210,4030)
NetB1_49: B1.49 JTAG.9 | length 1256.3
  Top Layer w6: B1.49 2561.21,3982.06 v1(2593.03,3982.06) ; v1(2798.07,4087.06) 3345,4087.06 3387.94,4130 JTAG.9
  Bottom Layer w6: v1(2593.03,3982.06) 2593.03,4015.74 2664.35,4087.06 v1(2798.07,4087.06)
NetB1_50: B1.50 JTAG.5 | length 1205
  Top Layer w6: B1.50 2896.85,4042.05 3008.9,3930 JTAG.5
NetB1_54: B1.54 JTAG.13 | length 1245.2
  Top Layer w6: B1.54 2644.96,4120.79 2854.18,4330 JTAG.13
NetB1_55: B1.55 JTAG.3 | length 1305.1
  Top Layer w6: B1.55 2572.96,4140.47 2594.54,4162.06 v1(2618.07,4162.06) ; v1(3530.9,3867.06) 3567.96,3830 JTAG.3
  Bottom Layer w6: v1(2618.07,4162.06) 3180,4162.06 3475,3867.06 v1(3530.9,3867.06)
NetB1_57: B1.57 J7.3 | length 851.6
  Top Layer w6: B1.57 2600.5,4179.84 2607.71,4187.06 2666.55,4187.06 2990.76,4511.26 3029.61,4511.26 J7.3
NetB1_58: B1.58 J7.2 | length 773.7
  Top Layer w6: B1.58 2523.43,4202.06 2660.34,4202.06 2986.58,4528.3 2998.3,4528.3 3075,4605 J7.2
NetB1_59: B1.59 J5.2 | length 831.5
  Top Layer w6: B1.59 2580,4219.21 2612.84,4252.06 v1(2638.03,4252.06) ; v1(2843.07,4666.99) 2953.68,4777.61 J5.2
  Bottom Layer w6: v1(2638.03,4252.06) 2843.07,4457.09 v1(2843.07,4666.99)
NetB1_60: B1.60 J7.1 | length 627.1
  Top Layer w6: B1.60 2557.24,4238.9 J7.1
NetBuck_1: Buck.1 C6P.2 | length 397.7
  Top Layer w6: v2(1735.87,1575.47) 1745.67,1565.67 Buck.1 ; v2(1770,1695) 1890,1695 C6P.2
  Bottom Layer w6: v2(1735.87,1575.47) 1735.87,1660.87 v2(1770,1695)
NetBuck_4: Buck.4 R8P.1 | length 215.7
  Top Layer w6: R8P.1@1650,1442.44 1728.23,1442.44 1755,1415.67 Buck.4
NetBuck_5: Buck.5 C7P.2 C8P.2 J2.2 LB.2 | length 2115.1
  Top Layer w6: J2.2 1560,1903.58 C8P.2 C7P.2 1335,1736.06 1335,1602.56 1563.35,1374.21 2007.15,1374.21 Buck.5 2072.35,1391.93 LB.2
NetBuck_8: Buck.8 C6P.1 D1.1 LB.1 | length 1290.9
  Top Layer w6: D1.1 1730,1831.61 1730,1678.43 1753.43,1655 1786.57,1655 1787.04,1655.47 1958.81,1655.47 Buck.8 2048.61,1621.51 C6P.1 2008.19,1758.07 LB.1
NetC01_2: C01.2 IC22.1 IC22.3 J2.3 J4.1 | length 1484.8
  Top Layer w6: J4.1 1930,2783.87 1982.76,2836.63 2152.56,2836.63 v1(2319.19,2670) ; J2.3 1992.52,2446.08 IC22.1 2033,2519.66 2048.34,2535 2085.12,2535 2107,2513.12 IC22.3 2178.86,2414.7 C01.2 2128.6,2400 v1(2113.6,2385)
  Bottom Layer w6: v1(2113.6,2385) 2113.6,2464.41 v1(2319.19,2670)
NetC1M_2: C1M.2 C4M.2 R1M.2 R2M.1 X1.3 | length 1582.4
  Top Layer w6: X1.3 X1.3@3675.29,3345.29 ; R1M.2@3766.24,3204.56 3796.97,3204.56 C4M.2 ; C1M.2 X1.3@3675.29,3345.29 ; R2M.1@3930.63,2794.82 4079.57,2794.82 4140,2855.26 4140,3134.12 4103.66,3170.45 3977.91,3170.45 C4M.2 ; X1.3@3675.29,3345.29 3793.94,3345.29 3904.49,3234.74 C4M.2
NetC1S_1: C1S.1 SWTH.1 SWTH.3 | length 575.5
  Top Layer w6: SWTH.3 SWTH.1 1433.43,4135.87 C1S.1
NetC2A_2: C2A.2 R2A.2 U.3 | length 912.3
  Top Layer w6: v1(2586.78,2322.94) 2576.61,2322.94 2535,2364.55 2535,2416.21 2548.79,2430 2610,2430 2627.05,2412.95 C2A.2 2669.91,2350.42 2682.98,2350.42 2690.29,2343.11 2869.88,2343.11 v1(2876.27,2336.72) ; v1(2601.78,2187.09) 2628.55,2160.32 R2A.2@2628.55,2141.98 ; v1(3006.78,2325.95) 3006.78,2384.19 U.3
  Bottom Layer w6: v1(2586.78,2322.94) 2601.78,2307.94 v1(2601.78,2187.09) ; v1(2876.27,2336.72) 2996.01,2336.72 v1(3006.78,2325.95)
NetC2B_2: C2B.2 R2B.2 U.5 | length 485.9
  Top Layer w6: U.5 3060.08,2341.39 3072.64,2328.83 3072.64,2268.83 3107.02,2234.46 3286.68,2234.46 3318.17,2202.96 3318.17,2192.13 3320.14,2194.1 C2B.2
NetC2C_2: C2C.2 R2C.2 U.10 | length 612.3
  Top Layer w6: U.10 3060.08,2666.98 3031.8,2695.27 3031.8,2755.28 3086.38,2809.86 3172.11,2809.86 3247.96,2734.01 3247.96,2723.8 3364.49,2840.34 C2C.2
NetC2D_2: C2D.2 R2D.2 U.12 | length 392.1
  Top Layer w6: C2D.2 2755.6,2858.29 2829.16,2858.29 2829.16,2836.61 2975.43,2690.34 ; 2975.48,2690.34 3008.9,2656.91 U.12
NetC2E_2: C2E.2 R2E.2 UAA.3 | length 217.4
  Top Layer w6: R2E.2@2204.45,2985 2204.45,3103.6 UAA.3 2226.13,3104 C2E.2
NetC3S_2: C3S.2 R4S.1 Y1.1 | length 550.2
  Top Layer w6: C3S.2 2031.05,4777.05 Y1.1 2206.42,4733.9 R4S.1@2370,4570.32
NetC5A_1: C5A.1 JO2.1 R4A.1 RT1.2 U.1 | length 1304.7
  Top Layer w6: JO2.1 2298.33,2210 C5A.1 2366.34,2352.26 2364.42,2354.19 2364.42,2438.02 2413.08,2486.68 2623.46,2486.68 2723.83,2386.31 U.1 2957.72,2339.24 2935.08,2316.6 2935.08,2270.64 RT1.2@2989.96,2215.76
NetC5A_2: C5A.2 R1A.2 R2A.1 | length 307.1
  Top Layer w6: C5A.2 2569.49,2141.98 2623.59,2087.88 2680.86,2087.88 R1A.2@2734.96,2141.99
NetC5B_1: C5B.1 JO3.1 R4B.1 RT2.1 U.7 | length 867
  Top Layer w6: U.7 3111.26,2343.11 3139,2315.38 3178.94,2315.38 3178.94,2291.98 ; RT2.1@3184.96,2310.13 3184.96,2292.73 3199.49,2278.21 3314.4,2278.21 3402.82,2366.62 3559.2,2366.62 3570.79,2355.04 3570.79,2328.83 3611.22,2328.83 C5B.1 3690.72,2331.79 JO3.1
NetC5B_2: C5B.2 R1B.2 R2B.1 | length 531.5
  Top Layer w6: R1B.2@3189.77,2192.13 3259.12,2192.13 3259.12,2156.14 3288.27,2126.98 3592.22,2126.98 C5B.2
NetC5C_1: C5C.1 JO4.1 R4C.1 RT3.2 U.8 | length 1217.6
  Top Layer w6: RT3.2@3096.26,2896.69 3096.26,2962.58 v1(3100.2,2966.51) ; U.8 U.8@3118.03,2624.43 ; v1(3184.49,2624.43) U.8@3118.03,2624.43 ; JO4.1 3555,2585.33 C5C.1 3320.43,2713.44 3301.26,2694.27 3204.17,2694.27 3159.41,2739.03 3129.73,2739.03 3129.73,2636.12 U.8@3118.03,2624.43
  Bottom Layer w6: v1(3100.2,2966.51) 3100.2,2708.72 v1(3184.49,2624.43)
NetC5C_2: C5C.2 R1C.2 R2C.1 | length 275.2
  Top Layer w6: R2C.1@3247.96,2664.23 3247.96,2579.43 3275.67,2607.14 C5C.2
NetC5D_1: C5D.1 JO5.1 R4D.1 RT4.2 U.14 | length 980.4
  Top Layer w6: RT4.2@2521.03,2846.98 R4D.1@2569.97,2846.98 ; C5D.1 2569.97,3050.13 R4D.1@2569.97,2846.98 ; JO5.1 2826.75,2486.68 U.14 2776.66,2617.65 2569.97,2824.35 R4D.1@2569.97,2846.98
NetC5D_2: C5D.2 R1D.2 R2D.1 | length 360.3
  Top Layer w6: C5D.2 2888.21,2874.02 2888.21,2858.29 2957.73,2858.29 R1D.2@2958.2,2857.81
NetC5E_1: C5E.1 RE4.1 RT5.2 UAA.1 | length 1052.5
  Top Layer w6: v1(1881.07,3138.23) 1944.69,3138.23 1988.46,3182 1988.46,3140 2026.95,3101.51 C5E.1 2127.56,3101.51 UAA.1 ; RT5.2@2363.9,3546.89 2363.9,3424.53 v1(2365.2,3423.23)
  Bottom Layer w6: v1(1881.07,3138.23) 2080.2,3138.23 v1(2365.2,3423.23)
NetC5E_2: C5E.2 R1E.2 R2E.1 | length 341.7
  Top Layer w6: C5E.2 2095.21,2940 2244.35,2940 2263.51,2959.15 2263.51,2985 R1E.2@2325,2985
NetC5S_2: C5S.2 IC7.5 | length 115.2
  Top Layer w6: C5S.2 1969.44,3632 IC7.5
NetCMK_1: CMK.1 JM1.1 RM2.2 | length 671.5
  Top Layer w6: JM1.1 2820,1767.56 2899,1688.56 RM2.2@2899,1679.53 ; CMK.1 2898.57,1805.08 2910,1793.65 RM2.2
NetCMK_2: CMK.2 MK.1 RMK.2 | length 1055.1
  Top Layer w6: CMK.2 2953.68,2095.69 3189.37,1860 3292.11,1860 3552.25,1599.86 MK.1
NetCO2_2: CO2.2 IC22.5 | length 89.6
  Top Layer w6: CO2.2 1966,2578.56 IC22.5
NetCO3_2: CO3.2 IC22.4 J3.1 | length 622.8
  Top Layer w6: J3.1 1799.25,2640 2045.56,2640 IC22.4 2123.44,2595 2168.47,2595 CO3.2
NetJTAG_11: JTAG.11 R1S.1 | length 138.2
  Top Layer w6: R1S.1@3541.27,4230 JTAG.11
NetJTAG_17: JTAG.17 R2S.1 | length 119.5
  Top Layer w6: R2S.1@3559.97,4530 JTAG.17
NetJTAG_19: JTAG.19 R3S.1 | length 121.6
  Top Layer w6: R3S.1@3559.97,4635 3674.49,4635 JTAG.19
NetR1B_1: R1B.1 RT1.1 | length 91.5
  Top Layer w6: RT1.1@3049.02,2215.76 3072.64,2192.13 R1B.1@3130.72,2192.13
NetR1C_1: R1C.1 RT2.2 | length 211.9
  Top Layer w6: RT2.2@3244.02,2310.13 3244.02,2516.43 R1C.1@3247.96,2520.37
NetR1D_1: R1D.1 RT3.1 | length 149.3
  Top Layer w6: R1D.1@2958.2,2798.76 2989.96,2798.76 3037.21,2846 RT3.1@3037.21,2896.69
NetR1E_1: R1E.1 RT4.1 | length 170.3
  Top Layer w6: R1E.1@2384.06,2985 2461.97,2907.08 RT4.1@2461.97,2846.98
NetR3A_1: R3A.1 R4A.2 U.2 | length 744.3
  Top Layer w6: R4A.2@2423.47,2354.19 2485.68,2291.99 R3A.1@2644.96,2291.99 ; R3A.1 2646.93,2288.59 2694.18,2241.35 v1(2899.49,2241.35) ; v1(2968.68,2289.14) 2983.31,2303.76 U.2
  Bottom Layer w6: v1(2899.49,2241.35) 2950.15,2241.35 2983.31,2274.51 v1(2968.68,2289.14)
NetR3B_1: R3B.1 R4B.2 U.6 | length 626.3
  Top Layer w6: U.6 3087.64,2384.34 3087.64,2285.37 3118.15,2254.86 3312.27,2254.86 3385,2327.59 3510.5,2327.59 R3B.1@3510.5,2268.64
NetR3C_1: R3C.1 R4C.2 U.9 | length 417
  Top Layer w6: R4C.2@3070.67,2739.03 3070.67,2690.34 3085.67,2675.34 U.9
  Top Layer w10: R4C.2@3070.67,2739.03 3070.67,2768.35 3092.33,2790 3151.76,2790 v1(3171.78,2769.99) ; v1(3169.49,2832.33) 3202.79,2799.03 R3C.1@3234.18,2799.03
  Bottom Layer w10: v1(3169.49,2832.33) 3169.49,2772.27 v1(3171.78,2769.99)
NetR3D_1: R3D.1 R4D.2 U.13 | length 573.4
  Top Layer w6: R3D.1@2633.63,2915.84 2633.63,2851.59 2629.02,2846.98 2629.02,2799.47 2753.16,2675.34 2969.26,2675.34 2983.31,2661.29 U.13
NetR3E_1: R3E.1 RE4.2 UAA.4 | length 290.2
  Top Layer w6: RE4.2@2047.52,3182 2076.15,3182 2098.15,3160 2168.05,3160 UAA.4 2231.66,3196 R3E.1@2289.66,3138
NetR3M_1: R3M.1 X1.4 | length 80
  Top Layer w6: R3M.1@3499.49,3346.03 3500.24,3345.29 X1.4
VBATT: Buck.2 Buck.3 C5P.2 R8P.2 | length 439.4
  Top Layer w6: C5P.2 1590.95,1442.44 1650,1501.49 1755,1501.49 ; Buck.3 1790.83,1465.67 1755,1501.49 ; Buck.2 1840.44,1501.49 1755,1501.49
VCC: BC1.2 BC2.2 BC3.1 BC4.1 BC5.2 C4S.2 C9M.2 C101M.2 IC7.1 IC7.3 J3.2 J4.2 R1M.1 RMK.1 U.4 UAA.5 X1.5 | length 1808.8
  Top Layer w6: v1(2011.47,3487.61) 2011.47,3531.47 IC7.1 ; C4S.2 2036.69,3450.64 2036.69,3523.31 IC7.1 ; v1(2026.95,3308.29) 2063.95,3271.29 BC5.2 2101.04,3225 UAA.5 ; IC7.3 2094,3563.6 2080.2,3577.4 2025.87,3577.4 2020,3571.54 IC7.1 ; v1(3034.49,2291.98) U.4 ; v2(3108.07,1830.47) 3137.6,1800.94 RMK.1@3189.37,1800.94 ; C101M.2 3573.54,2829.64 3424.49,2978.69 3424.49,3175.75 v1(3452.25,3203.51) ; X1.5 3511.37,3203.51 v1(3452.25,3203.51) ; R1M.1@3724.48,3162.8 3724.48,3144.53 BC4.1 ; C9M.2 BC4.1 ; v1(3452.25,3203.51) 3452.25,3131.79 BC2.2 BC1.2 BC3.1 BC4.1
VDD: C6S.2 IC7.4 J5.3 J6.1 JTAG.1 JTAG.2 | length 345.5
  Top Layer w6: C6S.2 2185.93,3595.12 2149.05,3632 IC7.4 2094,3649.95 2194.05,3750 2250,3750 v1(2252.68,3752.68)
VREF: C2A.1 C2B.1 C2C.1 C2D.1 C2E.1 C2M.2 C3M.2 R3A.2 R3B.2 R3C.2 R3D.2 R3E.2 R3M.2 X1.1 | length 5039.1
  Top Layer w6: R3E.2@2348.72,3138 2348.72,3063.74 C2E.1 2451.13,3050.13 v1(2524.97,2976.29) ; C2A.1 2625.79,2339.42 2678.42,2339.42 2704.02,2313.82 2704.02,2291.99 2795.71,2291.99 v1(2809.49,2305.77) ; v1(2696.62,2853.84) 2692.68,2857.77 2692.68,2915.84 C2D.1 ; v1(3169.49,2875.04) 3186.44,2858.09 3234.18,2858.09 C2C.1 ; v1(3379.49,2261.98) 3386.15,2268.64 3451.44,2268.64 3452.05,2268.03 C2B.1 ; v1(3381.29,3392.34) 3394.04,3405.09 R3M.2@3499.49,3405.09 ; v1(3649.49,3181.31) 3673.15,3204.96 3673.15,3255.89 ; X1.1 3673.15,3255.89 ; C2M.2 3970.95,3093.45 3946.98,3069.47 3859.57,3069.47 C3M.2 3673.15,3255.89
  Bottom Layer w6: v1(3379.49,2261.98) 3324.41,2206.9 2888.72,2206.9 2854.49,2241.13 2854.49,2260.77 v1(2809.49,2305.77) 2755.04,2305.77 2618.82,2441.98 v1(2510.71,2441.98) 2524.97,2456.24 v1(2524.97,2976.29) 2647.42,2853.84 v1(2696.62,2853.84) 2958.53,2853.84 3091.71,2987.01 3108.69,2987.01 3115.6,2980.1 3169.49,2926.21 v1(3169.49,2875.04) 3187.14,2892.69 3360.88,2892.69 v1(3649.49,3181.31) 3592.33,3181.31 v1(3381.29,3392.34)
VSIG: JM1.2 JO1.1 R1A.1 | length 510.7
  Top Layer w6: JM1.2 2820.83,1950 2844.92,1950 2858.69,1963.76 2858.69,2077.32 2794.02,2141.99 JO1.1
pads on no net: B1.1 B1.2 B1.3 B1.4 B1.8 B1.9 B1.10 B1.11 B1.15 B1.16 B1.17 B1.20 B1.21 B1.22 B1.23 B1.24 B1.25 B1.26 B1.27 B1.28 B1.29 B1.30 B1.33 B1.34 B1.35 B1.36 B1.37 B1.38 B1.39 B1.40 B1.41 B1.42 B1.43 B1.44 B1.45 B1.48 B1.51 B1.52 B1.53 B1.56 B1.61 B1.62 Buck.9 J6.3
copper on no net:
  other v1: 2922.24,4387.06

## Polygon pours and split planes (outlines as drawn)
no net on GND (split plane): 4246.15,1020.1 1020.1,1020.1 1020.1,4974.9 4246.15,4974.9
VCC on Power (split plane): 4246.15,1020.1 1020.1,1020.1 1020.1,3971.94 1702.08,3971.94 1743.6,3930.43 1743.6,3623.35 1743.83,3622.18 1744.49,3621.18 1797.84,3567.84 1798.83,3567.17 1800,3566.94 4068.6,3566.94 4069.77,3567.17 4070.77,3567.84 4112.16,3609.23 4112.83,3610.23 4113.06,3611.4 4113.06,4974.9 4246.15,4974.9
VDD on Power (split plane): 4106.94,3612.66 4067.34,3573.06 1801.27,3573.06 1749.71,3624.61 1749.71,3931.69 1749.48,3932.86 1748.82,3933.85 1705.51,3977.16 1704.52,3977.83 1703.35,3978.06 1020.1,3978.06 1020.1,4974.9 4106.94,4974.9

## Keep-outs
Keep-Out Layer:
  lines w10: 1005,4995 4275,4995 4260,4980 4260,1020 4245,1005 1020,1005 1005,1020 1005,4980 1020,4995

## Other copper
Power (plane layer: these items are gaps in the copper):
  lines w6: 975,3975 1703.35,3975 1746.65,3931.69 1746.65,3623.35 1800,3570 4068.6,3570 4110,3611.4 4110,5025

## Silkscreen, mask and mechanical layers (free items; w line width, h text height)
Top Overlay:
  text "Dufour" at 2876.27,3735 h60
  text "Robb" at 2893.13,3615 h60
  text "Guitar Tuner" at 2580,3424.53 h60
Mechanical 1:
  lines w47.24: 1000,1000 4266.25,1000 ; 1000,1000 1000,4995 ; 1000,1000 4266.25,1000 ; 1000,1000 1000,4995 ; 1000,1000 4266.25,1000 ; 1000,1000 1000,4995 ; 1000,4995 4150,4995 ; 1000,4995 4150,4995 ; 1000,4995 4150,4995 ; 4150,4995 4266.25,4995 ; 4150,4995 4266.25,4995 ; 4150,4995 4266.25,4995 ; 4266.25,1000 4266.25,4995 ; 4266.25,1000 4266.25,4995 ; 4266.25,1000 4266.25,4995